# Altium PCB PCB1.PcbDoc
Units mil, origin at the board's own origin, x right, y up, seen from the top; angles counter-clockwise.
Board outline 6313 x 3649 mil, 2 copper layers (Top Layer, Bottom Layer); 84 components, 103 nets, 338 pads, 288 vias.
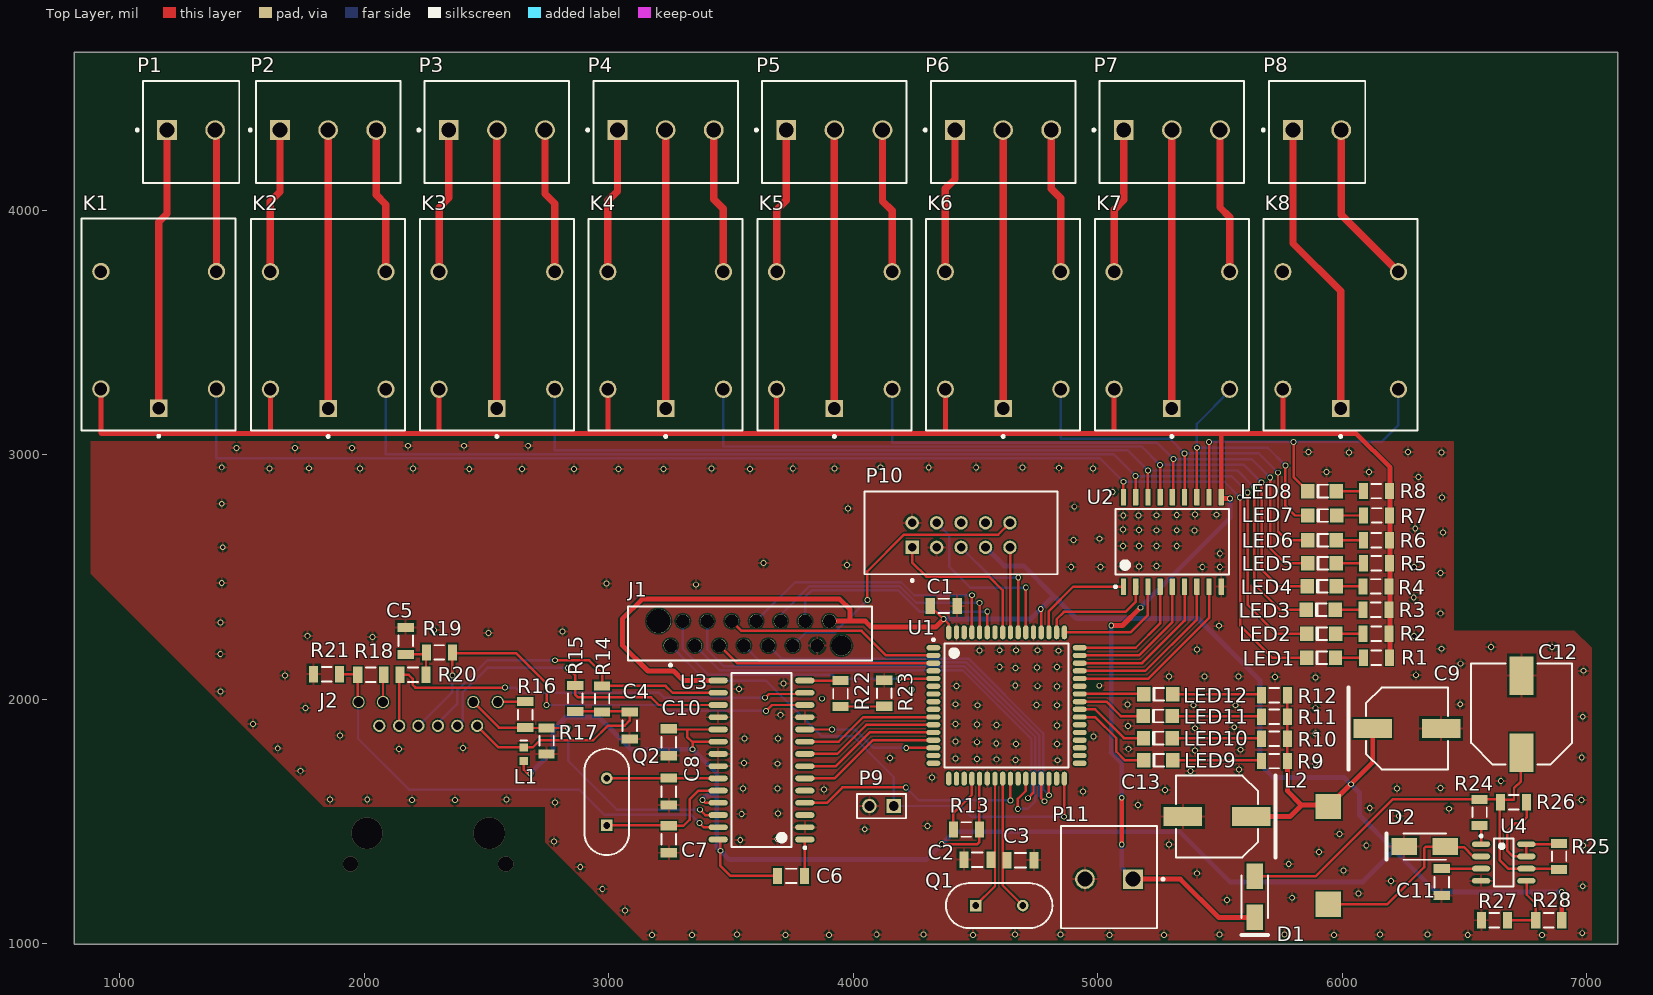
[diagram p0: Top Layer view]
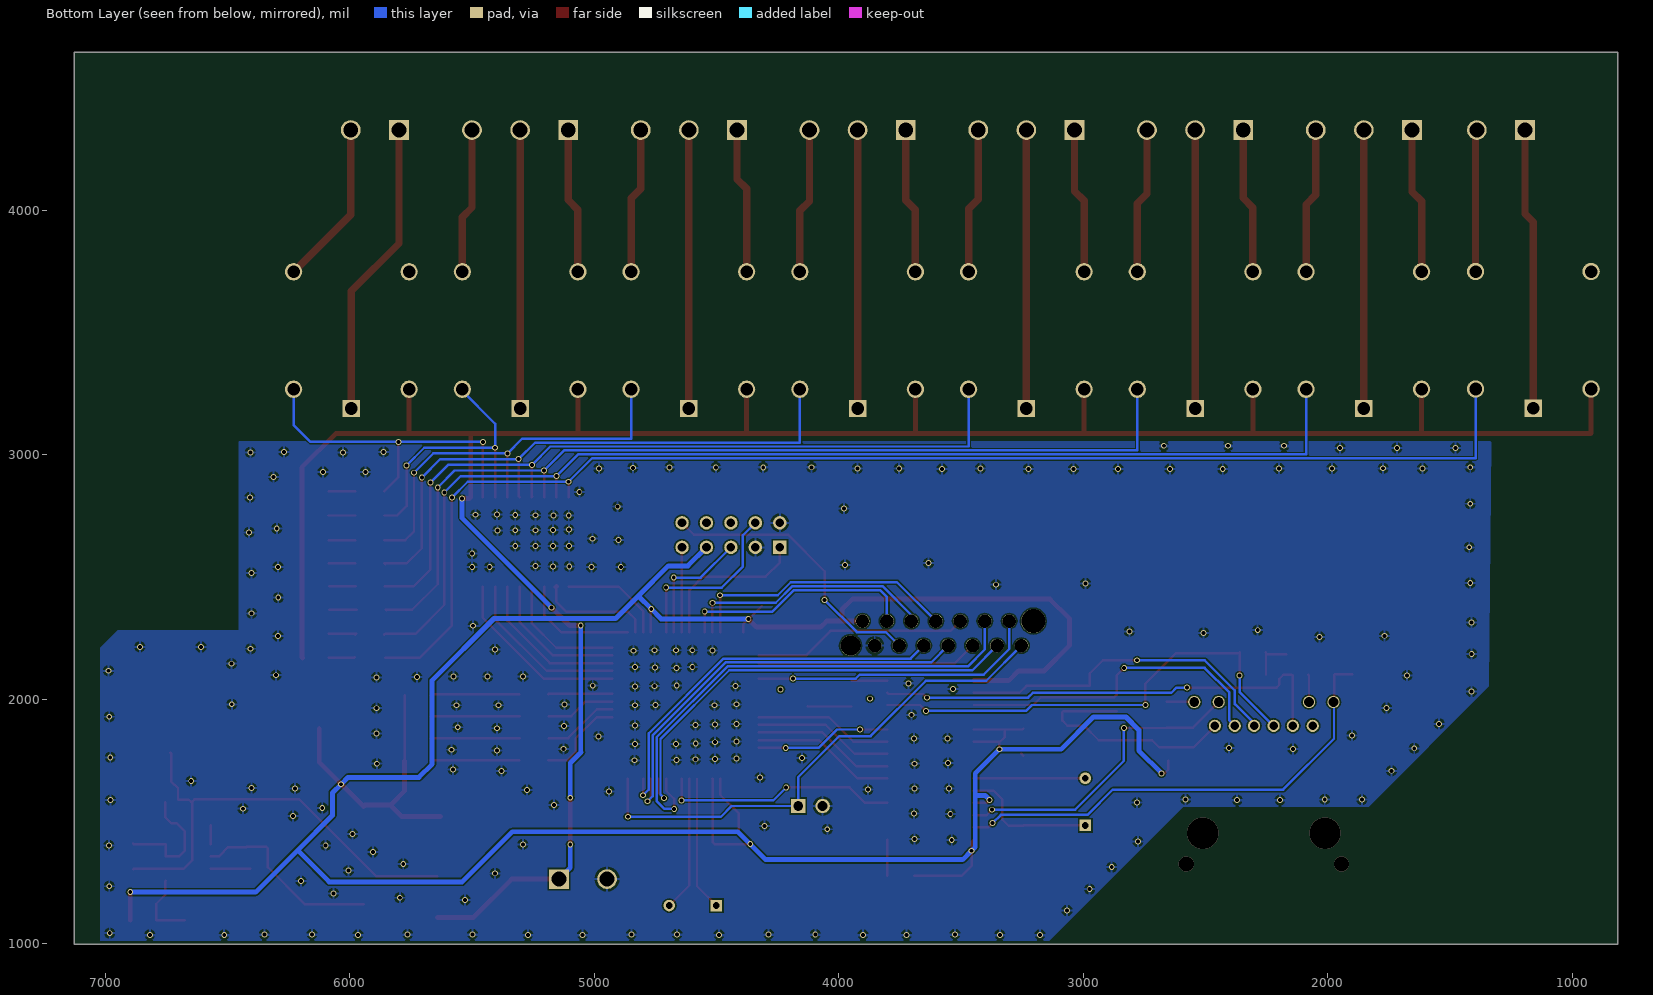
[diagram p1: Bottom Layer view, seen from below]

## Layer stack, top to bottom
Top Solder: solder mask 0.4, Solder Resist, Dk 3.5
Top Layer: signal copper 1.4
Dielectric 1: dielectric 12.6, FR-4, Dk 4.8
Bottom Layer: signal copper 1.4
Bottom Solder: solder mask 0.4, Solder Resist, Dk 3.5

## Board outline
814,998 7127,998 7127,4647 814,4647

## Design rules (kind name [scope] priority, off if disabled: settings)
Clearance [All] p1: gap=6 ignorepadtopadclearanceinfootprint=FALSE except(0: Arc-Hole Track-Hole SMDPad-Hole THPad-Hole Via-Hole Fill-Hole Poly-Hole Region-Hole Text-Hole)
DiffPairsRouting [All] p1: maxlimit=10 minlimit=6 mostfreqgap=10 toplayer_minwidth=15 toplayer_maxwidth=15 toplayer_prefwidth=15 bottomlayer_minwidth=15 bottomlayer_maxwidth=15 bottomlayer_prefwidth=15 maxuncoupledlength=500
HoleSize [All] p1: absolutevalues=TRUE maxlimit=150 minlimit=1 maxpercent=80.000 minpercent=20.000
MinimumSolderMaskSliver [All] p1: minsoldermaskwidth=1.5
PolygonConnect [All] p1: connectstyle=Relief reliefconductorwidth=10 reliefentries=4 polygonreliefangle="90 Angle" airgapwidth=10
RoutingVias [All] p1: holewidth=16 width=20 viastyle="Through Hole" minholewidth=16 minwidth=20 maxholewidth=28 maxwidth=50
SilkToSilkClearance [All] p1: silktosilkclearance=3
SilkToSolderMaskClearance [IsPad] p1: minsilkscreentomaskgap=3.5 clearancetoexposedcopper=TRUE
SolderMaskExpansion [All] p1: expansion=4
Width [All] p1: maxlimit=30 minlimit=6 preferedwidth=10 minimp=50.000000 maximp=50.000000 favimp=50.000000
25 further rules are at their usual default settings.

## Classes and differential pairs
component class ethernet_zasilanie: C4 C5 C6 C7 C8 C9 C10 C11 C12 C13 D1 D2 L1 L2 P11 Q2 R14 R15 R16 R17 R18 R19 R20 R21 R22 R23 R24 R25 R26 R27 R28 U3 U4
component class atmega_darlington_diodes: C1 C2 C3 J1 K1 K2 K3 K4 K5 K6 K8 LED7 LED8 LED9 LED10 LED11 LED12 P1 P2 P3 P4 P5 P6 P7 P8 P9 P10 Q1 R1 R2 R3 R4 R5 R6 R7 R8 R9 R10 R11 R12 R13 U1 U2

## Components (designator, comment, footprint, x,y, rotation, side; value= is the part's Value field where it differs from the comment)
C1 "1uF" CAPC1206(3216)130_L 4370,2382 r180 top
C2 "22pF" CAPC1206(3216)100_L 4508,1345 r0 top
C3 "22pF" CAPC1206(3216)100_L 4684,1343 r180 top
C4 "1uF" CAPC1206(3216)150_L 3086,1893 r90 top
C5 "100nF" CAPC1206(3216)190_L 2170,2239 r270 top
C6 "10uF" CAPC1206(3216)190_L 3746,1278 r0 top
C7 "22pF" CAPC1206(3216)100_L 3246,1428 r90 top
C8 "22pF" CAPC1206(3216)100_L 3246,1623 r90 top
C9 "470uF/16V" PNSC-FK-V-F_V 6264,1881 r0 top
C10 "1uF" CAPC1206(3216)130_L 3246,1824.88 r90 top
C11 "470pF" CAPC1206(3216)100_L 6406,1253 r270 top
C12 "470uF/25V" NIC-CAPA2-10X10_V 6733,1940 r90 top
C13 "470uF/16V" PNSC-FK-V-F_V 5488,1521.22 r180 top
D1 "SS14" FAIR-DO-214AC-2_V 5642,1193 r270 top
D2 "SS14" FAIR-DO-214AC-2_V 6337,1398 r180 top
J1 "490107671412" 490107671412 3578,2270 r180 top
J2 "08D0-1X1T-06-F" PCB_08D0-1X1T-06-F 2262,1672 r180 top
K1 "JS1-12V" PNSC-JS1-12V_V 1160,3533 r90 top
K2 "JS1-12V" PNSC-JS1-12V_V 1853,3532 r90 top
K3 "JS1-12V" PNSC-JS1-12V_V 2543,3532 r90 top
K4 "JS1-12V" PNSC-JS1-12V_V 3233,3532 r90 top
K5 "JS1-12V" PNSC-JS1-12V_V 3923,3532 r90 top
K6 "JS1-12V" PNSC-JS1-12V_V 4613,3532 r90 top
K7 "JS1-12V" PNSC-JS1-12V_V 5303,3532 r90 top
K8 "JS1-12V" PNSC-JS1-12V_V 5993,3532 r90 top
L1 "Inductor" INDC1608L 2653,1776 r270 top value=68uH
L2 "DL22-100" DL22 5943,1362 r270 top
LED1 "150120YS75000" 1206_A 5913,2169.9 r0 top
LED2 "150120YS75000" 1206_A 5914,2267.85 r0 top
LED3 "150120YS75000" 1206_A 5912,2366.85 r0 top
LED4 "150120YS75000" 1206_A 5916,2461.85 r0 top
LED5 "150120YS75000" 1206_A 5917,2556 r0 top
LED6 "150120YS75000" 1206_A 5917,2651 r0 top
LED7 "150120YS75000" 1206_A 5918,2752 r0 top
LED8 "150120YS75000" 1206_A 5917,2852 r0 top
LED9 "150120BS75000" 1206_A 5247,1752 r0 top
LED10 "150120GS75000" 1206_A 5246,1842 r0 top
LED11 "150120YS75000" 1206_A 5245,1932 r0 top
LED12 "150120RS75000" 1206_A 5247,2021 r0 top
P1 "SCREW-5.0/5.08 2WAYS" SCREW-5.0-2WAYS_V 1292.57,4328 r0 top
P2 "SCREW-5.0/5.08 3WAYS" SCREW-5.0-3WAYS_V 1853,4328 r0 top
P3 "SCREW-5.0/5.08 3WAYS" SCREW-5.0-3WAYS_V 2543,4328 r0 top
P4 "SCREW-5.0/5.08 3WAYS" SCREW-5.0-3WAYS_V 3233,4328 r0 top
P5 "SCREW-5.0/5.08 3WAYS" SCREW-5.0-3WAYS_V 3923,4328 r0 top
P6 "SCREW-5.0/5.08 3WAYS" SCREW-5.0-3WAYS_V 4613,4328 r0 top
P7 "SCREW-5.0/5.08 3WAYS" SCREW-5.0-3WAYS_V 5303,4328 r0 top
P8 "SCREW-5.0/5.08 2WAYS" SCREW-5.0-2WAYS_V 5897,4328 r0 top
P9 "PH2541-2-SPGRH-6-3" PH2541-2-SPGRH-6-3_V 4166,1564 r270 top
P10 "JTAG" 3M-2510-6002_V 4441,2672 r0 top
P11 "SCREW-5.0/5.08 2WAYS" SCREW-5.0-2WAYS_V 5046,1265 r180 top
Q1 "16MHz" JPY-HC-49US 4597,1157 r0 top
Q2 "25MHz" JPY-HC-49US 2992,1581 r90 top
R1 "1K" RESC1206(3216)_L 6139,2169.9 r0 top value="1000.00 Ohm"
R2 "1K" RESC1206(3216)_L 6138,2267.8 r0 top value="1000.00 Ohm"
R3 "1K" RESC1206(3216)_L 6137,2366.85 r0 top value="1000.00 Ohm"
R4 "1K" RESC1206(3216)_L 6137,2461.85 r0 top value="1000.00 Ohm"
R5 "1K" RESC1206(3216)_L 6139,2556 r0 top value="1000.00 Ohm"
R6 "1K" RESC1206(3216)_L 6139,2651 r0 top value="1000.00 Ohm"
R7 "1K" RESC1206(3216)_L 6140,2752 r0 top value="1000.00 Ohm"
R8 "1K" RESC1206(3216)_L 6139,2852 r0 top value="1000.00 Ohm"
R9 "1K" RESC1206(3216)_L 5722,1748.05 r0 top value="1000.00 Ohm"
R10 "1K" RESC1206(3216)_L 5722,1839.05 r0 top value="1000.00 Ohm"
R11 "1K" RESC1206(3216)_L 5722,1929.05 r0 top value="1000.00 Ohm"
R12 "1K" RESC1206(3216)_L 5722,2017 r0 top value="1000.00 Ohm"
R13 "10K" RESC1206(3216)_L 4463,1468 r180 top value="10000.00 Ohm"
R14 "51R" RESC1206(3216)_L 2973,2002 r270 top value="51.00 Ohm"
R15 "51R" RESC1206(3216)_L 2863,2004 r270 top value="51.00 Ohm"
R16 "10K" RESC1206(3216)_L 2659,1938 r90 top value="10000.00 Ohm"
R17 "180R" RESC1206(3216)_L 2746,1830 r270 top value="180.00 Ohm"
R18 "10K" RESC1206(3216)_L 2027,2101 r0 top value="10000.00 Ohm"
R19 "51R" RESC1206(3216)_L 2308,2192 r0 top value="51.00 Ohm"
R20 "51R" RESC1206(3216)_L 2200,2101 r180 top value="51.00 Ohm"
R21 "180R" RESC1206(3216)_L 1846.85,2103 r0 top value="180.00 Ohm"
R22 "2K2" RESC1206(3216)_L 3948,2024 r90 top value="2200.00 Ohm"
R23 "100R" RESC1206(3216)_L 4127,2025 r270 top value="100.00 Ohm"
R24 "1R" RESC1206(3216)_L 6561,1538 r270 top value="1.00 Ohm"
R25 "1R" RESC1206(3216)_L 6886,1358 r90 top value="1.00 Ohm"
R26 "1R" RESC1206(3216)_L 6700.06,1579 r0 top value="1.00 Ohm"
R27 "910R" RESC1206(3216)_L 6622,1097 r0 top value="910.00 Ohm"
R28 "1K5" RESC1206(3216)_L 6844,1097 r0 top value="1500.00 Ohm"
U1 "ATmega128-16AU" 64A_L 4627,1975 r0 top
U2 "ULN2803ADW" DW0018A_L 5305,2643.93 r90 top
U3 "ENC28J60-I/SO" SOIC-SO28_L 3625,1752 r180 top
U4 "MC34063ACD-TR" SO8_L 6660,1333 r0 top

## Footprints (in the part's own frame and the unit in brackets; to place one, negate y for a bottom-side part, rotate by r counter-clockwise, add the part's x,y. Pads: shape width x height; smd on the part's side, far side on the other; paste and mask are expansions set on the pad)
3M-2510-6002_V [mm] "Header, 10-Leads, Body 20.02x8.59mm, Pitch 2.54mm"
  rect 1.4x1.4 hole 0.89 mask+0.051: 1(-5.08,-1.27)
  round 1.4 hole 0.89 mask+0.051: 2(-2.54,-1.27) 3(0,-1.27) 4(2.54,-1.27) 5(5.08,-1.27) 6(5.08,1.27) 7(2.54,1.27) 8(0,1.27) 9(-2.54,1.27) 10(-5.08,1.27)
  silkscreen extent -10.01,-4.84 10.01,4.52, body extent -10.01,-4.12 10.01,4.52, height 9.95
64A_L [mm] "Thin QFP, 64-Leads, Body 14x14mm, Pitch 0.8mm, IPC High Density"
  oval 1.45x0.55 smd: 1(-7.6,6) 2(-7.6,5.2) 3(-7.6,4.4) 4(-7.6,3.6) 5(-7.6,2.8) 6(-7.6,2) 7(-7.6,1.2) 8(-7.6,0.4) 9(-7.6,-0.4) 10(-7.6,-1.2) 11(-7.6,-2) 12(-7.6,-2.8) 13(-7.6,-3.6) 14(-7.6,-4.4) 15(-7.6,-5.2) 16(-7.6,-6) 33(7.6,-6) 34(7.6,-5.2) 35(7.6,-4.4) 36(7.6,-3.6) 37(7.6,-2.8) 38(7.6,-2) 39(7.6,-1.2) 40(7.6,-0.4) 41(7.6,0.4) 42(7.6,1.2) 43(7.6,2) 44(7.6,2.8) 45(7.6,3.6) 46(7.6,4.4) 47(7.6,5.2) 48(7.6,6)
  oval 0.55x1.45 smd: 17(-6,-7.6) 18(-5.2,-7.6) 19(-4.4,-7.6) 20(-3.6,-7.6) 21(-2.8,-7.6) 22(-2,-7.6) 23(-1.2,-7.6) 24(-0.4,-7.6) 25(0.4,-7.6) 26(1.2,-7.6) 27(2,-7.6) 28(2.8,-7.6) 29(3.6,-7.6) 30(4.4,-7.6) 31(5.2,-7.6) 32(6,-7.6) 49(6,7.6) 50(5.2,7.6) 51(4.4,7.6) 52(3.6,7.6) 53(2.8,7.6) 54(2,7.6) 55(1.2,7.6) 56(0.4,7.6) 57(-0.4,7.6) 58(-1.2,7.6) 59(-2,7.6) 60(-2.8,7.6) 61(-3.6,7.6) 62(-4.4,7.6) 63(-5.2,7.6) 64(-6,7.6)
  silkscreen extent -7.72,-6.45 6.45,6.95, body extent -7,-7 7,7, height 1.6
1206_A [mm] "Chip LED, 2-Leads, Body 3.2x1.6mm, IPC Medium Density"
  rect 1.4x1.5 smd: 1(-1.5,0) 2(1.5,0)
  silkscreen extent -0.5,-0.66 0.6,0.65, body extent -1.6,-0.8 1.6,0.8, height 0.68
490107671412 [mm] "REDFIT IDC SKEDD Connector, pitch 2.54mm, 14p"
  round 1.42 hole 1.4: 1(8.255,1.27) 2(6.985,-1.27) 3(5.715,1.27) 4(4.445,-1.27) 5(3.175,1.27) 6(1.905,-1.27) 7(0.635,1.27) 8(-0.635,-1.27) 9(-1.905,1.27) 10(-3.175,-1.27) 11(-4.445,1.27) 12(-5.715,-1.27) 13(-6.985,1.27) 14(-8.255,-1.27)
  round 2.1 hole 2.1 unplated: MH1(-9.485,1.27)
  round 2.5 hole 2.5 unplated: MH2(9.485,-1.27)
  silkscreen extent -12.68,-2.8 12.68,3.42, body extent -12.68,-2.8 12.68,2.8, height 10.48
CAPC1206(3216)100_L [mm] "Chip Capacitor, Body 3.2x1.6mm, Height 1mm, IPC High Density"
  rect 0.95x1.7 smd: 1(-1.4,0) 2(1.4,0)
  silkscreen extent -0.55,-0.75 0.55,0.75, body extent -1.7,-0.9 1.7,0.9, height 1
CAPC1206(3216)130_L [mm] "Chip Capacitor, Body 3.2x1.6mm, Height 1.3mm, IPC High Density"
  rect 0.95x1.7 smd: 1(-1.4,0) 2(1.4,0)
  silkscreen extent -0.55,-0.75 0.55,0.75, body extent -1.7,-0.9 1.7,0.9, height 1.3
CAPC1206(3216)150_L [mm] "Chip Capacitor, Body 3.2x1.6mm, Height 1.5mm, IPC High Density"
  rect 0.95x1.7 smd: 1(-1.4,0) 2(1.4,0)
  silkscreen extent -0.55,-0.75 0.55,0.75, body extent -1.7,-0.9 1.7,0.9, height 1.5
CAPC1206(3216)190_L [mm] "Chip Capacitor, Body 3.2x1.6mm, Height 1.9mm, IPC High Density"
  rect 0.95x1.7 smd: 1(-1.4,0) 2(1.4,0)
  silkscreen extent -0.55,-0.75 0.55,0.75, body extent -1.7,-0.9 1.7,0.9, height 1.9
DL22 [mm]
  rect 2.64x2.64 smd: 1(5.08,0) 2(-5.08,0)
DW0018A_L [mm] "SOIC, 18-Leads, Body 11.8x7.6mm, Pitch 1.27mm, IPC High Density"
  rrect18% 1.7x0.55 smd: 1(-4.65,5.08) 2(-4.65,3.81) 3(-4.65,2.54) 4(-4.65,1.27) 5(-4.65,0) 6(-4.65,-1.27) 7(-4.65,-2.54) 8(-4.65,-3.81) 9(-4.65,-5.08) 10(4.65,-5.08) 11(4.65,-3.81) 12(4.65,-2.54) 13(4.65,-1.27) 14(4.65,0) 15(4.65,1.27) 16(4.65,2.54) 17(4.65,3.81) 18(4.65,5.08)
  silkscreen extent -4.77,-5.9 3.4,6.03, body extent -3.8,-5.9 3.8,5.9, height 2.65
FAIR-DO-214AC-2_V [mm] "DO-214, 2-Leads, Body 4.375x2.725mm"
  rect 2.65x1.75 smd: 1(-2.15,0) 2(2.15,0)
  silkscreen extent -2.19,-1.36 3.98,1.36, body extent -2.19,-1.36 2.19,1.36, height 2.5
INDC1608L [mm] "Chip Inductor, Body 1.6x0.8mm, IPC High Density"
  rect 0.8x0.9 smd: 1(-0.7,0) 2(0.7,0)
  silkscreen extent -1.4,-0.35 -1.4,0.35, body extent -0.87,-0.48 0.87,0.48, height 0.55
JPY-HC-49US [mm] "THD, 2-Leads, Body 11.05x4.65mm, Pitch 4.9mm"
  rect 1.2x1.2 hole 0.7: 1(-2.45,0)
  round 1.2 hole 0.7: 2(2.45,0)
  silkscreen extent -5.53,-2.32 5.53,2.32, body extent -5.53,-2.33 5.52,2.32, height 3.5
NIC-CAPA2-10X10_V [mm] "Aluminum Electrolytic Capacitor, Diameter 10mm, Height 10.8mm, Pitch 8mm"
  rect 4x2.5 smd: 1(-4,0) 2(4,0)
  silkscreen extent -5.25,-5.25 5.25,5.25, body extent -4.96,-4.99 5,4.99, height 10.8
PCB_08D0-1X1T-06-F [mm]
  round 1.27 hole 0.89: 1(-5.08,-5.585) 2(-3.015,-5.585) 3(-1.015,-5.585) 4(1.015,-5.585) 5(3.015,-5.585) 6(5.08,-5.585)
  round 1.27 hole 1.02: 7(-7.23,-8.055) 8(-4.69,-8.055) 9(4.69,-8.055) 10(7.23,-8.055)
  body extent -8.85,-9.03 8.16,16.5, height 13.49
PH2541-2-SPGRH-6-3_V [mm] "Male Header, Pitch 2.54mm, 2x1 Position, Mated Height 6mm, Tail Length 3mm"
  rect 1.5x1.5 hole 1.02: 1(0,0)
  round 1.5 hole 1.02: 2(0,-2.54)
  silkscreen extent -1.27,-3.81 1.27,1.27, body extent -1.27,-3.81 1.27,1.27, height 8.4
PNSC-FK-V-F_V [mm] "CAPAE, 2-Leads, Body 8.50x8.50mm"
  rect 4x2 smd: 1(-3.55,0) 2(3.55,0)
  silkscreen extent -6.05,-4.25 4.25,4.25, body extent -5,-4.25 5,4.25, height 10.5
PNSC-JS1-12V_V [mm] "THD, 5-Leads, Body 22x16mm"
  rect 1.8x1.8 hole 1.3: 1(-8.7,0)
  round 1.8 hole 1.3: 2(-6.7,-6) 3(5.5,-6) 4(5.5,6) 5(-6.7,6)
  silkscreen extent -11.72,-8 11,8, body extent -11,-8 11,8, height 16.4
RESC1206(3216)_L [mm] "Chip Resistor, Body 3.2x1.6mm, IPC High Density"
  rect 0.95x1.7 smd: 1(-1.35,0) 2(1.35,0)
  silkscreen extent -0.5,-0.75 0.5,0.75, body extent -1.67,-0.87 1.67,0.87, height 0.75
SCREW-5.0-2WAYS_V [mm] "Socket, Screw Terminal Block, 2-Leads, Pitch 5mm, 90 Degree Angle, Through-Hole"
  rect 2.05x2.05 hole 1.55: 1(-2.5,0)
  round 2.05 hole 1.55: 2(2.5,0)
  silkscreen extent -5.72,-5.5 5,5.1, body extent -5,-5.5 5.02,5.1, height 18.2
SCREW-5.0-3WAYS_V [mm] "Socket, Screw Terminal Block, 3-Leads, Pitch 5mm, 90 Degree Angle, Through-Hole"
  rect 2.05x2.05 hole 1.55: 1(-5,0)
  round 2.05 hole 1.55: 2(0,0) 3(5,0)
  silkscreen extent -8.22,-5.5 7.5,5.1, body extent -7.5,-5.5 7.5,5.1, height 18.2
SO8_L [mm] "SOIC, 8-Leads, Body 4.9x3.9mm, Pitch 1.27mm, IPC High Density"
  oval 1.9x0.6 smd: 1(-2.35,1.905) 2(-2.35,0.635) 3(-2.35,-0.635) 4(-2.35,-1.905) 5(2.35,-1.905) 6(2.35,-0.635) 7(2.35,0.635) 8(2.35,1.905)
  silkscreen extent -2.47,-2.5 1,2.88, body extent -2,-2.5 2,2.5, height 1.75
SOIC-SO28_L [mm] "SOIC, 28-Leads, Body 17.9x7.5mm, Pitch 1.27mm, IPC High Density"
  oval 2x0.6 smd: 1(-4.5,8.255) 2(-4.5,6.985) 3(-4.5,5.715) 4(-4.5,4.445) 5(-4.5,3.175) 6(-4.5,1.905) 7(-4.5,0.635) 8(-4.5,-0.635) 9(-4.5,-1.905) 10(-4.5,-3.175) 11(-4.5,-4.445) 12(-4.5,-5.715) 13(-4.5,-6.985) 14(-4.5,-8.255) 15(4.5,-8.255) 16(4.5,-6.985) 17(4.5,-5.715) 18(4.5,-4.445) 19(4.5,-3.175) 20(4.5,-1.905) 21(4.5,-0.635) 22(4.5,0.635) 23(4.5,1.905) 24(4.5,3.175) 25(4.5,4.445) 26(4.5,5.715) 27(4.5,6.985) 28(4.5,8.255)
  silkscreen extent -4.62,-9.05 3.1,9.23, body extent -3.8,-9.05 3.8,9.05, height 2.65

## Part data
C1 C10: library part CMP-1037-04671-1, "CAP 1uF 10V ±5% 1206 (3216 Metric) Thickness 1.3mm SMD", Case-EIA=1206, Case-Metric=3216, Rated Voltage="10 V", Tolerance=±5%, Max Thickness="1.3 mm", Technology=SMT
C2 C3 C7 C8: library part CMP-1037-00952-1, "CAP 22pF 10V ±0.25pF 1206 (3216 Metric) Thickness 1mm SMD", Case-EIA=1206, Case-Metric=3216, Rated Voltage="10 V", Tolerance=±0.25pF, Max Thickness="1 mm", Technology=SMT
C4: library part CMP-1037-04667-1, "CAP 1uF 6.3V ±5% 1206 (3216 Metric) Thickness 1.45mm SMD", Case-EIA=1206, Case-Metric=3216, Rated Voltage="6.3 V", Tolerance=±5%, Max Thickness="1.45 mm", Technology=SMT
C5: library part CMP-1037-04169-1, "CAP 100nF 10V ±1% 1206 (3216 Metric) Thickness 1.9mm SMD", Case-EIA=1206, Case-Metric=3216, Rated Voltage="10 V", Tolerance=±1%, Max Thickness="1.9 mm", Technology=SMT
C6: library part CMP-1037-04960-1, "CAP 10uF 6.3V ±5% 1206 (3216 Metric) Thickness 1.9mm SMD", Case-EIA=1206, Case-Metric=3216, Rated Voltage="6.3 V", Tolerance=±5%, Max Thickness="1.9 mm", Technology=SMT
C9 C13: library part CMP-2000-06204-1, "Aluminum Electrolytic Capacitor, 470 uF, +/- 20%, 16 V, 2-Pin SMD (Size Code F), -55 to 105 degC, RoHS, Tape and Reel", Capacitance=470µF, Case Size/Dimension=O8x10.2mm, Lifetime@Temperature=2000Hrs@105°C, Manufacturer=Panasonic, Operating Temp-Max=105°C, Operating Temp Range=-55to+105°C, Package Description="2-Pin Electrolytic Aluminum Capacitor, Body 8.3 x 8.3 mm", Package Reference=FK-V-F, Rated Voltage=16V, Ripple Current=600mA, Datasheet URL=http://industrial.panasonic.com/cdbs/www-data/pdf/RDE0000/ABA0000C1181.pdf, Datasheet Version=03/2016, Impedance=0.16O, Manufacturer URL=http://www.panasonic.com/, Mounting Technology=SurfaceMount, Package URL=http://industrial.panasonic.com/cdbs/www-data/pdf/RDE0000/DME0000COL48.pdf, Series=FK, Type=Can
C11: library part CMP-1037-02128-1, "CAP 470pF 10V ±1% 1206 (3216 Metric) Thickness 1mm SMD", Case-EIA=1206, Case-Metric=3216, Rated Voltage="10 V", Tolerance=±1%, Max Thickness="1 mm", Technology=SMT
C12: library part CMP-0687-00002-1, "Aluminum Electrolytic Capacitor, UD Series, Low Impedance, 470 uF, 25 V, + / - 20%, -55 to 105 degC, Chip Type, 10 x 10 mm D x L, Pb-Free, Reel", Manufacturer=Nichicon, PartNumber=UUD1E471MNL1GS, Rated Capacitance="470 uF", Rated Ripple Current (at 100kHz)="670 mA", Rated Voltage="25 V", Tolerance Rated Capacitance="-20 to 20%", ComponentLink1Description="Manufacturer URL", ComponentLink1URL=http://www.nichicon.co.jp/, ComponentLink2Description=Datasheet, ComponentLink2URL=http://products.nichicon.co.jp/en/pdf/XJA043/e-ud.pdf, ComponentLink3Description="Package Specification", ComponentLink3URL=http://products.nichicon.co.jp/en/pdf/XJA043/e-ud.pdf, DatasheetVersion=08/2012, Diameter="10 mm", Endurance Time="5000 h", Impedance="0.09 Ohm", Length="10 mm", Mounting Technology="Surface Mount", PackageDescription="2-Pin Surface Mount Device, Diameter 10 mm, Height 10 mm, Pitch 8 mm", PackageReference=CAPAE-D10H10, Packing="Dia382mm Reel", RoHS=TRUE
D1 D2: library part CMP-2000-04943-1, "Schottky Rectifier, 1.1 W, -65 to 125 degC, 2-Pin SMD, RoHS, Tape and Reel", Average Forward Current-Max (A)=1, Manufacturer=Fairchild, Package Body Material=PLASTIC/EPOXY, Package Description="2-Pin Surface Mount Device, Body 4.375 x 2.725 mm", Package Reference=DO-214AC-2, Package Shape=RECTANGULAR, Package Style=SMALLOUTLINE, Peak Reflow Temperature (Cel)=260, Power Dissipation Limit-Max (W)=1.1, Rep Pk Reverse Voltage-Max (V)=40, Additional Feature=FREEWHEELINGDIODE, CAGE Code=1HBD3,07933,59621,7D893, Configuration=SINGLE, Datasheet URL=http://www.onlinecomponents.com/datasheet/ss14.aspx?p=11369800, Datasheet Version=Oct-13, Diode Element Material=SILICON, JEDEC-95 Code=DO-214AC, JESD-30 Code=R-PDSO-C2, JESD-97 Code=e3, Lead Free=YES, Manufacturer URL=https://www.fairchildsemi.com/, Moisture Sensitivity Level=1, Number of Elements=1, Number of Terminals=2, Package URL=https://www.fairchildsemi.com/package-drawings/DO/DO214AC.pdf, RoHS Compliant=YES, Signal Diode Type=SIGNALDIODE, Surface Mount=YES, Technology=SCHOTTKY, Terminal Finish=MATTETIN, Terminal Form=CBEND, Terminal Position=DUAL
J1: library part CMP-1502-02453-1, "REDFIT IDC SKEDD Connector WR-WST, pitch 2.54 mm, 14 pins", Contact Resistance=10mOhm, Manufacturer="Wurth Elektronik", Operating Temperature=-25to105degC, Rated Current=1A, Working Voltage=500VAC, Datasheet URL=https://katalog.we-online.de/em/datasheet/490107671412.pdf, Manufacturer URL=http://www.we-online.de, Mounting Technology=Plug-in, Package Reference=490107671412, Packaging=Tube, Part Number=490107671412, PCB Thickness=1.6mm, Pin Number=14, Pitch=2.54mm, Publisher=WurthElektronik
J2: supplier part number 1=507-1445-ND, helpurl=https://www.belfuse.com/resources/ICMs/ICMs%20Drawings/08B0-1X1T-06-F.pdf, supplier 1=Digi-Key
K1 K2 K3 K4 K5 K6 K7 K8: library part CMP-2000-06502-1, "Cubic Type 1C Power Relay, SPDT, 10 A, 12 V, -40 to 70 degC, 5-Pin THD, RoHS, Bulk", Coil Current=30mA, Coil operating lower percent limit=70%, Coil operating upper percent limit=130%, Coil Resistance=400ohm, Coil Voltage VDC Nom=12V, Contact Current Max=10A, Contact Voltage AC Nom=277V, Contact Voltage DC Nom=100V, Current, contact min=6A@277Vac, Manufacturer=Panasonic, Nom Operating Power=360mW, Package Description="5-Pin Through Hole Device, Body 22 x 16 mm", Resistance, coil=400R, Temperature, operating (a) max=70°C, Temperature, operating (a) min=-40°C, Time, operating=10ms, Voltage, contact AC max=125V, Voltage, switching AC/DC min=277Vac, Approval Bodies=UL&CSA,TUV, Coil Type=DC, Configuration, contact=SPCO, Contact Configuration=SPDT, Current, contact AC max=10A, Current, switch max=10A, Datasheet URL=https://www3.panasonic.biz/ac/e_download/control/relay/power/catalog/mech_eng_js.pdf, Datasheet Version=12/2016, Depth, external=16.4mm, Diameter, PCB hole=1.3mm, External Depth=22mm, External Height=16mm, External Width=22mm, Length / Height, external=22mm, Manufacturer URL=http://www.panasonic.com/, Material, contact=Silveralloy, Mounting Technology=ThroughHole, Package Reference=JS1-12V, Power, coil DC=360mW, Relay Mounting=ThroughHole, Relay Type=Power, Time, release=10ms, Voltage, coil DC nom=12V, Width, external=16.4mm
LED1 LED2 LED3 LED4 LED5 LED6 LED7 LED8 LED11: library part CMP-1426-00019-1, "SMD mono-color Chip LED, WL-SMCW, Yellow", Color=Yellow, Manufacturer="Wuerth Elektronik", ComponentLink1Description="Manufacturer URL", ComponentLink1URL=http://www.we-online.com, ComponentLink2Description=Datasheet, ComponentLink2URL=http://katalog.we-online.com/led/datasheet/150120YS75000.pdf, PackageReference=1206_A, PartNumber=150120YS75000
LED9: library part CMP-1426-00015-1, "SMD mono-color Chip LED, WL-SMCW, Blue", Color=Blue, Manufacturer="Wuerth Elektronik", ComponentLink1Description="Manufacturer URL", ComponentLink1URL=http://www.we-online.com, ComponentLink2Description=Datasheet, ComponentLink2URL=http://katalog.we-online.com/led/datasheet/150120BS75000.pdf, PackageReference=1206_A, PartNumber=150120BS75000
LED10: library part CMP-1426-00014-1, "SMD mono-color Chip LED, WL-SMCW, Green", Color=Green, Manufacturer="Wuerth Elektronik", ComponentLink1Description="Manufacturer URL", ComponentLink1URL=http://www.we-online.com, ComponentLink2Description=Datasheet, ComponentLink2URL=http://katalog.we-online.com/led/datasheet/150120GS75000.pdf, PackageReference=1206_A, PartNumber=150120GS75000
LED12: library part CMP-1426-00013-1, "SMD mono-color Chip LED, WL-SMCW, Red", Color=Red, Manufacturer="Wuerth Elektronik", ComponentLink1Description="Manufacturer URL", ComponentLink1URL=http://www.we-online.com, ComponentLink2Description=Datasheet, ComponentLink2URL=http://katalog.we-online.com/led/datasheet/150120RS75000.pdf, PackageReference=1206_A, PartNumber=150120RS75000
P1 P8 P11: library part CMP-0617-00009-1, "Socket, Screw Terminal Block, 2 Way, 5.0 mm Pitch, 90 Degree Angle, Through-Hole", Contact Resistance="20 mOhm", Insulation Resistance="5000 MOhm / 1000 V", Manufacturer="No Vendor", Rated Current="25 A", Rated Voltage="300 V", Temperature Range="-40 to 105 degC", ComponentLink1Description=Datasheet, ComponentLink1URL="5mm screw terminal in SVN", Mounting Technology="Through Hole", PackageDescription="Socket, Screw Terminal Block, 2 Way, Pitch 5 mm, 90 Degree Angle, Through-Hole", PartNumber="SCREW-5.0/5.08 2WAYS", Poles=2
P2 P3 P4 P5 P6 P7: library part CMP-0617-00010-1, "Socket, Screw Terminal Block, 3 Way, 5.0 mm Pitch, 90 Degree Angle, Through-Hole", Contact Resistance="20 mOhm", Insulation Resistance="5000 MOhm / 1000 V", Manufacturer="No Vendor", Rated Current="25 A", Rated Voltage="300 V", Temperature Range="-40 to 105 degC", ComponentLink1Description=Datasheet, ComponentLink1URL="5mm screw terminal in SVN", Mounting Technology="Through Hole", PackageDescription="Socket, Screw Terminal Block, 3 Way, Pitch 5 mm, 90 Degree Angle, Through-Hole", PartNumber="SCREW-5.0/5.08 3WAYS", Poles=3
P9: library part CMP-0261-00001-1, "Male Header, Pitch 2.54mm, 2x1 Position, Mated Height 6mm, Tail Length 3mm", ComponentLink1Description="Manufacturer URL", ComponentLink1URL=http://www.suzhoupinchao.com/, Mounting Technology="Through Hole", PackageDescription="2-Pin Male Header IDC, 2.54 x 5.08 mm Body, 2.54 mm Pitch", PackageReference=PH2541-2-SPGRH-6-3, PartNumber=PH2541-2-SPGRH-6-3
P10: library part CMP-2000-05545-1, "Male Header, Pitch 2.54 mm, 2 x 5 Position, Height 9.91 mm, Tail Length 2.84 mm, -55 to 105 degC, RoHS, Bulk", Color=Gray, Manufacturer=3M, Package Description="Male Header, Pitch 2.54 mm, 2 x 5 Position, Height 9.91 mm, Tail Length 2.84 mm", Package Reference=2510-6002, Standard Package=784, Associated Product="3505-33(1000BX)-ND / -CONNEJECTORLATCHLONGSNAP-IN", Catalog Drawings=6002UB,RBSeries, Category=Connectors,Interconnects, Connector Type=Header,Shrouded, Contact Finish=Gold, Contact Finish Thickness=30µin(0.76µm), Contact Mating Length="0.243\"(6.17mm)", Contact Type=MalePin, Datasheet URL=http://multimedia.3m.com/mws/media/330367O/3mtm-100-in-4-wall-hdr-rohs-lp-straightra-hitemp-ts0770.pdf, Datasheet Version="Rev. M, 08/2014", Dynamic Catalog=2500Series, Family=RectangularConnectors-Headers,MalePins, Manufacturer URL=http://www.3m.com/, Mating Products="CHG-2010-S01010-KEP-ND / -CONNRCPTIDC10POS24-22AWG / 3M11964-ND / -CONNSOCKET10POSIDCW/STRREL / 89110-0003-ND / -CONNSOCKET10POSIDCW/STRREL / 5110-B7A2PL-ND / -10/2R/BMSKT/.100 / MKC10E-ND / -CONN10POSIDCSOCKET10AUW/POL / MSC10E-ND / -CONN10POSIDCSOCKET15GOLD / D89110-0101HK-ND / -CONN10POSIDCSOCKETGOLDW/POL / D89110-0001HK-ND / -CONN10POSIDCSOCKETGOLD / MSPV10-ND / -CONNSOCKETPCBVERT10POS.1\" / 3M9088-ND / -CONNRECEPTIDC10POS24-22AWG / More...", Mounting Technology=ThroughHole, Mounting Type=ThroughHole, Number of Positions=10, Number of Positions Loaded=All, Number of Rows=2, Other Names="5400782713 / 54007827139 / 80-6105-6503-0 / 80610565030 / MHB10G / MHB10K", Packaging=Bulk, Pitch="0.100\"(2.54mm)", Product Training Modules=IDCWiremountConnectorsPrimer, Row Spacing="0.100\"(2.54mm)", Series=2500, Termination=Solder
Q1: library part CMP-2100-03645-1, "Crystal, 16 MHz, +/- 30 ppm, 18 pF, -20 to 70 degC, 2-Pin THD", Manufacturer="Jing peng yuan", Package Description="2-Pin Throug Hole Device, Body 11.05 x 4.65 mm, Pitch 4.9 mm", Package Reference=HC-49US, Datasheet URL=https://statics3.seeedstudio.com/images/opl/datasheet/306010014.pdf, Datasheet Version=42125.0
Q2: library part CMP-2100-03645-1, "Crystal, 25 MHz, +/- 30 ppm, 22 pF, -20 to 70 degC, 2-Pin THD", Manufacturer="Jing peng yuan", Package Description="2-Pin Throug Hole Device, Body 11.05 x 4.65 mm, Pitch 4.9 mm", Package Reference=HC-49U, Datasheet URL=https://pl.mouser.com/datasheet/2/96/008-0308-0-1160929.pdf, Datasheet Version=42125.0
R1 R2 R3 R4 R5 R6 R7 R8 R9 R10 R11 R12: library part CMP-1014-00510-1, "1K 0.25W 1% 1206 (3216 Metric)  SMD", Case-EIA=1206, Case-Metric=3216, Power="0.25 W", Tolerance="1 %", Technology=SMT
R13 R16 R18: library part CMP-1014-00623-1, "10K 0.25W 1% 1206 (3216 Metric)  SMD", Case-EIA=1206, Case-Metric=3216, Power="0.25 W", Tolerance="1 %", Technology=SMT
R14 R15 R19 R20: library part CMP-1014-00364-1, "51R 0.25W 1% 1206 (3216 Metric)  SMD", Case-EIA=1206, Case-Metric=3216, Power="0.25 W", Tolerance="1 %", Technology=SMT
R17 R21: library part CMP-1014-00424-1, "180R 0.25W 1% 1206 (3216 Metric)  SMD", Case-EIA=1206, Case-Metric=3216, Power="0.25 W", Tolerance="1 %", Technology=SMT
R22: library part CMP-1014-00546-1, "2K2 0.25W 1% 1206 (3216 Metric)  SMD", Case-EIA=1206, Case-Metric=3216, Power="0.25 W", Tolerance="1 %", Technology=SMT
R23: library part CMP-1014-00397-1, "100R 0.25W 1% 1206 (3216 Metric)  SMD", Case-EIA=1206, Case-Metric=3216, Power="0.25 W", Tolerance="1 %", Technology=SMT
R24 R25 R26: library part CMP-1014-00171-1, "1R 0.25W 1% 1206 (3216 Metric)  SMD", Case-EIA=1206, Case-Metric=3216, Power="0.25 W", Tolerance="1 %", Technology=SMT
R27: library part CMP-1014-00506-1, "910R 0.25W 1% 1206 (3216 Metric)  SMD", Case-EIA=1206, Case-Metric=3216, Power="0.25 W", Tolerance="1 %", Technology=SMT
R28: library part CMP-1014-00528-1, "1K5 0.25W 1% 1206 (3216 Metric)  SMD", Case-EIA=1206, Case-Metric=3216, Power="0.25 W", Tolerance="1 %", Technology=SMT
U1: library part CMP-0095-00653-1, "8-bit AVR Microcontroller, 4.5-5.5V, 128KB Flash, 4KB EEPROM, 4KB SRAM, 64-pin TQFP, Industrial Grade (-40°C to 85°C), Reel", Code_JEDEC=MS-026-AEB, ComponentLink1Description="Manufacturer URL", ComponentLink1URL=http://www.atmel.com/, ComponentLink2Description="ATmega128(L) Datasheet", ComponentLink2URL=http://www.atmel.com/dyn/resources/prod_documents/doc2467.pdf, ComponentLink3Description="ATmega128(L) Summary", ComponentLink3URL=http://www.atmel.com/dyn/resources/prod_documents/2467S.pdf, DatasheetVersion="revX, Jun-2011", PackageDescription="64-Pin Plastic Thin Profile Quad Flat Pack, 14 x 14 x 1.0 mm Body, 0.8 mm Pitch (TQFP)", PackageReference=64A, PackageVersion="revC, Oct-2010"
U2: library part CMP-2000-07353-1, "Darlington Transistor NPN, 50 V, 0.5 A, -40 to 85 degC, 18-Pin SOIC (DW), Green (RoHS & no Sb/Br), Tube", Collector Emitter Voltage V(br)ceo=50V, Current Ic Continuous a Max=500mA, Manufacturer="Texas Instruments", Operating Temperature Max=85°C, Operating Temperature Min=-40°C, Operating Temperature Range=-40°Cto+85°C, Package / Case=18-SOIC, Package Description="18-Pin Plastic Small Outline, Body 11.55 x 7.5 mm, Pitch 1.27 mm", Package Reference=DW18, Package Version="4040000-3/G, 01/2011", Transistor Case Style=SOIC, Base Number=2803, Datasheet URL=http://www.ti.com/lit/ds/symlink/uln2803a.pdf, Datasheet Version="Rev. G, 01/2015", DC Collector Current=500mA, Device Marking=ULN2803ADW, Id=0.5A, Manufacturer URL=http://www.ti.com/, Module Configuration=Eight, Mounting Technology=SurfaceMount, MSL=MSL2-1year, No. of Pins=18, No. of Transistors=8, Package URL=http://www.ti.com/lit/ml/mpds172a/mpds172a.pdf, SVHC=NoSVHC(19-Dec-2012), Transistor Polarity=NPN
U3: library part CMP-0186-00132-2, "Stand-Alone Ethernet Controller with SPI Interface, 28-Pin SOIC, Industrial Temperature", Code_JEDEC=MS-013, ComponentLink1Description="Manufacturer URL", ComponentLink1URL=http://www.microchip.com/, ComponentLink2Description=Datasheet, ComponentLink2URL=http://ww1.microchip.com/downloads/en/DeviceDoc/39662c.pdf, ComponentLink3Description="Package Specification", ComponentLink3URL=http://www.microchip.com/stellent/groups/techpub_sg/documents/packagingspec/en012702.pdf, DatasheetVersion="revC, Jan-2008", PackageDescription="28-Lead Plastic Small Outline (SO) - Wide 7.50mm Body [SOIC]", PackageReference=SOIC-SO28, PackageVersion="revBB, Aug-2009", RevisionNote="URLs added."
U4: library part CMP-0241-00016-1, "DC/DC converter control circuit, 8-Pin SO, Tape and Reel", Code_IPC=SOIC127P600-8, Code_JEDEC=MS-012-AA, ComponentLink1Description="Manufacturer URL", ComponentLink1URL=http://www.st.com, ComponentLink2Description=Datasheet, ComponentLink2URL=http://www.st.com/internet/com/TECHNICAL_RESOURCES/TECHNICAL_LITERATURE/DATASHEET/CD00001232.pdf, ComponentLink3Description="Package Specification", ComponentLink3URL=http://www.st.com/internet/com/TECHNICAL_RESOURCES/TECHNICAL_LITERATURE/PACKAGE_INFORMATION/CD00004680.pdf, DatasheetVersion=Nov-2007, PackageDescription="8-Pin Small Outline Integrated Circuit 1.27 mm Pitch", PackageReference=SO8, PackageVersion=Dec-2002
L1: Published=8-Jun-2000, Publisher="Altium Limited"
L2: helpurl=https://www.tme.eu/pl/Document/6ba894df3330489656add27ab934f082/dl2250.pdf, supplier 1=TME, supplier part number 1=DL22-100

## Via types
v1: diameter 24, hole 16, Top Layer to Bottom Layer, tented both sides, 284 vias
v2: diameter 61.81, hole 61.81, Top Layer to Bottom Layer, 2 vias
v3: diameter 127.95, hole 127.95, Top Layer to Bottom Layer, 2 vias

## Nets (pads, with @x,y where several pads share a name; then routed paths per layer and width w, separated by ;. In a path a pad name is that pad's centre, name@x,y a point inside that pad or via, vN(x,y) a via of type N, cw(c..) or ccw(c..) an arc to the next point about the centre after c; other vN are vias at no path point)
+12: D1.2 K1.5 K2.5 K3.5 K4.5 K5.5 K6.5 K7.5 K8.5 P11.1 R1.2 R2.2 R3.2 R4.2 R5.2 R6.2 R7.2 R8.2 U2.10 | length 10231.2
  Top Layer w20: K1.5 923.78,3089.22 926,3087 1616.78,3087 ; K2.5 1616.78,3087 ; 2306,3090 2306.78,3090.78 K3.5 ; K4.5 2996.78,3089.22 2998,3088 ; 3686.78,3089 K5.5 ; 4376,3090 4376.78,3090.78 K6.5 ; v1(5055,2302) 5101,2302 v1(5174,2375) ; 5066,3089 5066.78,3089.78 K7.5 ; v1(5098,1407) v1(5098,1598) ; P11.1 5338,1265 5495,1108 5641.65,1108 D1.2 ; v1(5541,2821) 5511,2821 U2.10 5505,3087 ; K8.5 5756.78,3088.22 5757,3088 ; R1.2 6195.15,2172.9 6195.15,2948.85 6057,3087 5505,3087 ; 1616.78,3087 5505,3087
  Bottom Layer w20: v1(5055,2302) 5055,1785 5054,1784 5098,1740 v1(5098,1598) ; v1(5098,1407) 5098,1311.43 P11.1 ; v1(5174,2375) 5541,2742 v1(5541,2821)
/Rst: J1.11 P10.6 | length 1164.5
  Top Layer w10: v1(4058,2407) 4058,2524 4208,2674 4593,2674 P10.6
  Bottom Layer w10: J1.11 3808,2275 3926,2275 v1(4058,2407)
/RxD: J1.6 U1.2 | length 882.9
  Top Layer w10: J1.6 3543,2280 4034,2280 4134.28,2179.72 U1.2
/RxD1: J1.4 U1.27 | length 2090.3
  Top Layer w10: v1(4673,1552) 4673,1593 4705.74,1625.74 U1.27
  Bottom Layer w10: J1.4 3403,2204 3472,2135 4455,2135 4745,1845 4745,1584 4713,1552 v1(4673,1552)
/TxD: J1.5 U1.3 | length 904.5
  Top Layer w10: J1.5 3524.77,2148.23 U1.3
/TxD1: J1.3 U1.28 | length 1871.9
  Top Layer w10: v1(4714,1596) 4737.24,1619.24 U1.28
  Bottom Layer w10: J1.3 3454,2119 4448,2119 4729,1838 4729,1611 v1(4714,1596)
ADC2: J1.12 U1.59 | length 976.4
  Top Layer w10: U1.59 v1(4548.26,2358.74)
  Bottom Layer w10: J1.12 3803,2418 3832,2447 4183.37,2447 4271.63,2358.74 v1(4548.26,2358.74)
CS_ENC: U1.10 U3.9 | length 567.4
  Top Layer w10: U3.9 3940.37,1827 4041.13,1927.76 U1.10
CTS: J1.10 U1.60 | length 1036.1
  Top Layer w10: J1.10 J1.10@3703,2344 ; U1.60 4516.76,2394.76 v1(4517,2395)
  Bottom Layer w10: J1.10@3703,2344 3822,2463 4190,2463 4258,2395 v1@4516.76,2395
DSR: J1.9 U1.30 | length 1603.1
  Top Layer w10: v1(4800,1608) 4800,1675.56 U1.30
  Bottom Layer w10: J1.9 3706,2167 4471,2167 4777,1861 4777,1631 v1(4800,1608)
DTR: J1.7 U1.29 | length 1735.6
  Top Layer w10: U1.29 4768.73,1596.27 v1(4781.5,1583.5)
  Bottom Layer w10: J1.7 3622,2151 4463,2151 4761,1853 4761,1604 v1(4781.5,1583.5)
GND: C1.1 C2.1 C3.1 C4.1 C5.1 C7.1 C8.1 C9.2 C10.1 C11.2 C12.2 C13.2 D2.2 J1.13 P9.2 P10.2 P10.10 P11.2 R17.2 R21.1 R23.1 R27.1 U1.22 U1.53 U1.63 U2.9 U3.2 U3.11 U3.18 U3.21 U3.22 U4.4 | length 10.2
  Top Layer w10: C10.1 C10.1@3253.24,1777
  other v1: 3177,1037 3341.48,1037 3723,1037 3900.93,1037 4490,1037 5048,1037 5271.5,1037 5966,1037 6513,1037 6817,1037 3525,1039 4096,1039 4287,1039 4661.78,1039 4848,1039 5498,1039 5763,1039 6154,1039 6349,1039 6981,1044 3067,1137 5528,1180 5795,1189 6066,1207 2974,1224 6983,1236 6199,1257 5405,1288.86 6005,1300.07 2884,1314 5781,1327.32 5905,1376 6098,1403 6984.5,1403 5292,1407 2777,1419 3538,1425 3690,1428.54 5988,1450 4047,1469 4304,1483 6231,1523 3544,1532.04 3693,1534 6436,1553 6112,1556 5165,1568.65 2781,1578 2196,1588 2371,1588 6978,1588 1861,1590 2013,1591 2582,1591 4939,1624 5275,1630 3881,1631 3549,1634.93 3691,1634.93 6223,1636 6401,1637 6648,1666 4322.06,1680 5379,1707 1740,1708 5577,1713 3690,1737 5889,1737 3553,1740 4835,1751 4664,1752 4586,1755 4506,1757 4419,1759 4151,1760 6979,1763 5398,1791 5583,1794 2143,1797 5125,1798 1647,1800 2404,1802 4664.93,1818 4834,1818 4585,1820 4506,1825 4419,1828 3555,1840 3693,1840 4982,1849 1902,1853 5890.5,1860 5398,1882 5558,1886 5124,1891.88 4834,1894 4586,1895.35 4506,1898 4419,1899 1545,1899.97 6983,1929 3702,1937 5890.5,1964 1760,1965 4508.3,1976 4834,1976 5392,1976 5563.65,1976 4750,1977 5121,1979 4419,1980 6482,1980 1413,2032 3533,2043 4834,2052 4754,2054 4422,2055 5006,2056 4662.71,2057 3715,2064.78 5890.5,2090 5725,2091 5436,2093 5291,2094 5576,2094 1676,2098.2 6301,2099 6986,2117 4664,2129 4752,2130 4599,2132 4834,2132 6483,2146 1412,2186 4840,2199 4517.07,2200 4599,2201 4664.93,2201 4754,2201 5406,2204 6405,2207 6608,2214 6858,2215 2034,2255 6293,2259 1769,2260 2508,2272 2812,2278 2287,2283 5495,2301 1413,2315 6401,2352 6292,2416 3357,2469 2991,2474 1418,2476 6402,2517 4891.34,2541 5011,2541 5427.42,2541 5499,2541 6293,2542 5102,2544 5167.98,2544 5240,2546 3974,2550 3633,2557 5499,2596 1422,2622 5102.56,2627 5167.98,2627 5240,2627 5323,2627 4900,2651.31 5007,2657 6411,2683 5394.86,2690 5240,2691.67 5323,2691.67 5167.98,2692.69 5103.56,2694 6298,2699 5104.28,2752 5166.98,2752 5240,2753 5323,2754 5485,2755 5397.42,2756 3979,2780 4904,2788 1418,2800 6408,2826 5061,2848.65 6311,2910 5936,2930 6109,2930 2430,2942 2646,2942 2858,2942 3040,2942 3225,2942 3578,2942 1613,2944 1983,2944 2200,2944 3421,2944 3753,2944 3924,2944 4981,2944 1774,2945 4842,2947 1418,2949 4111,2949 4309,2948.98 4502.85,2948.98 4691.59,2948.98 6028,3010 6406,3010 5861,3012 6269,3012 1478,3028 1718,3028 1950,3028 2179,3037 2408,3037 2671,3037
INIT: J1.1 P9.1 U1.32 | length 2124.4
  Top Layer w10: v1(4862,1520) 4863.22,1521.22 U1.32
  Bottom Layer w10: J1.1 3397,2076 3644,2076 3870,1850 3998,1850 4166,1682 P9.1 4438,1564 4482,1520 v1(4862,1520)
INT: U1.25 U3.4 | length 977.4
  Top Layer w10: U3.4 3893,1577 3956,1640 v1(4215,1640) ; v1(4642.75,1587) U1.25
  Bottom Layer w10: v1(4215,1640) 4268,1587 v1(4642.75,1587)
LED_A: J2.10 R18.1 R21.2 U3.27 | length 1961.9
  Top Layer w10: R21.2 1971.85,2103 R18.1 1973.85,1992.63 J2.10 ; v1(3371,1494) 3388,1477 U3.27
  Bottom Layer w10: J2.10 1975,1986.77 1975,1839 2183,1631 2880,1631 2983,1528 3337,1528 v1(3371,1494)
LED_B: J2.8 R16.1 R17.1 U3.26 | length 1271.1
  Top Layer w10: J2.8 2550.92,1884.85 R16.1 2660.7,1883.15 R17.1 2746.15,1883 v1(2834,1883) ; v1(3373,1549) 3395,1527 U3.26
  Bottom Layer w10: v1(2834,1883) 2834,1749 3034,1549 v1(3373,1549)
LED_Power: LED9.1 U1.39 | length 366.8
  Top Layer w10: U1.39 4989.24,1927.76 5076,1841 5076,1786 5110,1752 LED9.1
LED_RX: LED10.1 U1.40 | length 309.3
  Top Layer w10: U1.40 4989.75,1959.25 5107,1842 LED10.1
LED_ST: LED12.1 U1.42 | length 262.2
  Top Layer w10: U1.42 5186.7,2022.24 LED12.1
LED_TX: LED11.1 U1.41 | length 284.1
  Top Layer w10: U1.41 5035.25,1990.75 5094,1932 LED11.1
MISO: U1.13 U3.6 | length 590.4
  Top Layer w10: U3.6 3924,1677 4080.27,1833.27 U1.13
MOSI: U1.12 U3.7 | length 582.7
  Top Layer w10: U3.7 3929.46,1727 4067.22,1864.76 U1.12
NetC2_2: C2.2 Q1.1 U1.23 | length 551.6
  Top Layer w10: Q1.1 4579.76,1236.21 4579.76,1344 U1.23
NetC3_2: C3.2 Q1.2 U1.24 | length 552.8
  Top Layer w10: U1.24 4611.25,1239.2 Q1.2
NetC4_2: C4.2 J2.1 L1.1 R14.2 R15.2 | length 961.3
  Top Layer w10: J2.1 2550.32,1803.56 L1.1 2689.56,1803.56 2719,1833 2937,1833 2997,1893 3066,1893 3086,1913 C4.2 ; R15.2 C4.2@3083.27,1950.85
NetC5_2: C5.2 R19.1 R20.1 | length 177.5
  Top Layer w10: C5.2 2246.73,2183.88 R19.1@2253.15,2190.3 ; R20.1 R19.1@2253.15,2190.3 ; R19.1 R19.1@2253.15,2190.3
NetC6_2: C6.2 U3.1 | length 149.4
  Top Layer w10: C6.2 3801.12,1425.95 U3.1
NetC7_2: C7.2 Q2.1 U3.24 | length 564.6
  Top Layer w10: Q2.1 3244.57,1484.54 C7.2 3306.12,1483.12 3331.12,1508.12 3331.12,1591.12 3367,1627 U3.24
NetC8_2: C8.2 Q2.2 U3.23 | length 456.6
  Top Layer w10: Q2.2 2992.66,1678.12 C8.2 3446.72,1678.12 U3.23
NetC11_1: C11.1 U4.3 | length 161.5
  Top Layer w10: C11.1 6567.36,1308.12 U4.3
NetD2_1: D2.1 L2.1 U4.2 | length 784.5
  Top Layer w10: L2.1 6183,1162 6335,1314 6335,1392 6341,1398 D2.1 6423.65,1396 6497,1396 6535,1358 U4.2
NetJ2_7: J2.7 R16.2 | length 113.2
  Top Layer w10: J2.7 2548.67,1991.15 R16.2
NetJ2_9: J2.9 R18.2 | length 113
  Top Layer w10: J2.9 2077.35,2098.2 R18.2
NetK1_1: K1.1 P1.1 | length 1151.7
  Top Layer w30: K1.1 1160,3952 1194.15,3986.15 P1.1
NetK1_2: K1.2 LED1.1 U2.18 | length 5447.9
  Top Layer w10: U2.18 v1(5105,2890) ; v1(5582,2825) 5582,2302 5714.1,2169.9 LED1.1
  Bottom Layer w10: K1.2 1396.22,2986.78 1397,2986 5009,2986 v1(5105,2890) 5517,2890 v1(5582,2825)
NetK1_3: K1.3 P1.2 | length 580.6
  Top Layer w10: P1.2 P1.2@1396.22,4322.78
  Top Layer w30: K1.3 P1.2@1396.22,4322.78
NetK2_1: K2.1 P2.2 | length 1138.5
  Top Layer w30: K2.1 P2.2
NetK2_2: K2.2 LED2.1 U2.17 | length 4692.9
  Top Layer w10: U2.17 v1(5155,2913) ; v1(5613,2846) 5613,2386 5731.15,2267.85 LED2.1 ; LED2.1@5857.94,2264.85 LED2.1@5858.94,2265.85
  Bottom Layer w10: K2.2 2089.22,3002 5066,3002 v1(5155,2913) 5546,2913 v1(5613,2846)
NetK2_3: K2.3 P2.3 | length 595.8
  Top Layer w30: P2.3 2049.85,4063.15 2089.22,4023.78 K2.3
NetK2_4: K2.4 P2.1 | length 595.8
  Top Layer w30: K2.4 1616.78,4036.78 1656.15,4076.15 P2.1
NetK3_1: K3.1 P3.2 | length 1138.5
  Top Layer w30: K3.1 P3.2
NetK3_2: K3.2 LED3.1 U2.16 | length 3937.5
  Top Layer w10: U2.16 v1(5205,2936) ; v1(5640,2867) 5640,2471 5744.15,2366.85 LED3.1 LED3.1@5850.94,2364.85
  Bottom Layer w10: K3.2 2779.22,3018 2802,3018 5123,3018 v1(5205,2936) 5571,2936 v1(5640,2867)
NetK3_3: K3.3 P3.3 | length 595.8
  Top Layer w30: P3.3 2739.85,4067.15 2779.22,4027.78 K3.3
NetK3_4: K3.4 P3.1 | length 595.8
  Top Layer w30: K3.4 2306.78,4010.78 2346.15,4050.15 P3.1
NetK4_1: K4.1 P4.2 | length 1138.5
  Top Layer w30: K4.1 P4.2
NetK4_2: K4.2 LED4.1 U2.15 | length 3201.5
  Top Layer w10: U2.15@5253,2829.07 5255,2827.07 v1(5255,2959) ; v1(5670,2887) 5670,2531 5739.15,2461.85 LED4.1
  Bottom Layer w10: 3469,3034 5180,3034 v1(5255,2959) 5598,2959 v1(5670,2887) ; 3469,3035 3469.22,3035.22 K4.2
NetK4_3: K4.3 P4.3 | length 595.8
  Top Layer w30: P4.3 3429.85,4045.15 3469.22,4005.78 K4.3
NetK4_4: K4.4 P4.1 | length 595.8
  Top Layer w30: K4.4 2996.78,4038.78 3036.15,4078.15 P4.1
NetK5_1: K5.1 P5.2 | length 1138.5
  Top Layer w30: K5.1 P5.2
NetK5_2: K5.2 LED5.1 U2.14 | length 2452.1
  Top Layer w10: U2.14@5305,2827.07 5309,2831.07 v1(5309,2982.39) ; v1(5705,2907) 5705,2618 5767,2556 LED5.1 LED5.1@5854.94,2553
  Bottom Layer w10: K5.2 4159.22,3050 5241.39,3050 v1(5309,2982.39) 5629.61,2982.39 v1(5705,2907)
NetK5_3: K5.3 P5.3 | length 595.8
  Top Layer w30: P5.3 4119.85,4037.15 4159.22,3997.78 K5.3
NetK5_4: K5.4 P5.1 | length 595.8
  Top Layer w30: K5.4 3686.78,4001.78 3726.15,4041.15 P5.1
NetK6_1: K6.1 P6.2 | length 1138.5
  Top Layer w30: K6.1 P6.2
NetK6_2: K6.2 LED6.1 U2.13 | length 1705.2
  Top Layer w10: v1(5355,3006) 5355,2827.07 U2.13@5356,2828.07 ; v1(5737,2927) 5737,2687 5773,2651 LED6.1 LED6.1@5856.94,2650
  Bottom Layer w10: K6.2 4849.22,3066 4864,3066 5295,3066 v1(5355,3006) 5658,3006 v1(5737,2927)
NetK6_3: K6.3 P6.3 | length 595.8
  Top Layer w30: P6.3 4809.85,4088.15 4849.22,4048.78 K6.3
NetK6_4: K6.4 P6.1 | length 595.8
  Top Layer w30: K6.4 4376.78,4087.78 4416.15,4127.15 P6.1
NetK7_1: K7.1 P7.2 | length 1138.5
  Top Layer w30: K7.1 P7.2
NetK7_2: K7.2 LED7.1 U2.12 | length 1160.5
  Top Layer w10: U2.12@5405,2827.07 v1(5405,3029) ; v1(5767.39,2956.39) 5767.39,2790.61 5806,2752 LED7.1
  Bottom Layer w10: K7.2@5542.7,3264.74 5405,3127.04 v1(5405,3029) 5694.78,3029 v1(5767.39,2956.39)
NetK7_3: K7.3 P7.3 | length 595.8
  Top Layer w30: P7.3 5499.85,4011.15 5539.22,3971.78 K7.3
NetK7_4: K7.4 P7.1 | length 595.8
  Top Layer w30: K7.4 5066.78,4002.78 5106.15,4042.15 P7.1
NetK8_1: K8.1 P8.1 | length 1219.1
  Top Layer w30: P8.1 5798.57,3864.43 5993,3670 K8.1
NetK8_2: K8.2 LED8.1 U2.11 | length 1399.5
  Top Layer w10: U2.11@5455,2827.07 v1(5455,3053) ; v1(5801,3053) 5801,2908.94 LED8.1
  Bottom Layer w10: v1(5455,3053) v1(5801,3053) 6160.22,3053 6229.22,3122 K8.2
NetK8_3: K8.3 P8.2 | length 676.3
  Top Layer w30: P8.2 5995.43,3982.33 K8.3
NetLED1_2: LED1.2 R1.1 | length 108
  Top Layer w10: LED1.2@5979.06,2172.85 5982.01,2169.9 R1.1
NetLED2_2: LED2.2 R2.1 | length 116
  Top Layer w10: LED2.2 6084.8,2267.85 R2.1 ; LED2.2@5978.06,2264.85 LED2.2@5981.01,2267.8
NetLED3_2: LED3.2 R3.1 | length 112.8
  Top Layer w10: LED3.2 R3.1
NetLED4_2: LED4.2 R4.1 | length 108.8
  Top Layer w10: LED4.2 R4.1
NetLED5_2: LED5.2 R5.1 | length 109.8
  Top Layer w10: LED5.2 R5.1
NetLED6_2: LED6.2 R6.1 | length 109.8
  Top Layer w10: LED6.2 R6.1
NetLED7_2: LED7.2 R7.1 | length 109.8
  Top Layer w10: LED7.2 R7.1
NetLED8_2: LED8.2 R8.1 | length 109.8
  Top Layer w10: LED8.2 R8.1
NetLED9_2: LED9.2 R9.1 | length 364.4
  Top Layer w10: LED9.2 5664.9,1752 R9.1
NetLED10_2: LED10.2 R10.1 | length 365
  Top Layer w10: LED10.2 5665.9,1842 R10.1
NetLED11_2: LED11.2 R11.1 | length 366
  Top Layer w10: LED11.2 5665.9,1932 R11.1
NetLED12_2: LED12.2 R12.1 | length 364.5
  Top Layer w10: LED12.2 5664.85,2021 R12.1
NetR13_2: R13.2 U1.20 | length 239
  Top Layer w10: R13.2 4409.85,1534.85 4485.27,1610.27 U1.20
NetR22_1: R22.1 R23.2 | length 179.4
  Top Layer w10: R22.1 4126,1970.85 R23.2
NetR22_2: R22.2 U3.14 | length 145.9
  Top Layer w10: U3.14 3947.85,2077 R22.2
NetR24_2: R24.2 U4.1 | length 76.9
  Top Layer w10: U4.1 R24.2@6567.48,1484.85
NetR25_2: R25.2 R26.2 U4.7 U4.8 | length 515.9
  Top Layer w10: R26.2 6753.2,1517.2 6730,1494 6708,1494 6674,1460 6674,1382 6698,1358 U4.7 U4.8 6882.85,1408 R25.2
NetR27_2: R27.2 R28.1 U4.5 | length 292.6
  Top Layer w10: R27.2 R28.1 6790.85,1164.15 6754,1201 6754,1256.52 U4.5
NetU1_44: U1.44 U2.8 | length 759.4
  Top Layer w10: U1.44 5207.4,2085.24 5455,2332.83 U2.8
NetU1_45: U1.45 U2.7 | length 699.6
  Top Layer w10: U1.45 5194.36,2116.73 5405,2327.37 U2.7
NetU1_46: U1.46 U2.6 | length 639.7
  Top Layer w10: U1.46 5181.31,2148.23 5355,2321.92 U2.6
NetU1_47: U1.47 U2.5 | length 579.9
  Top Layer w10: U1.47 5168.27,2179.72 5305,2316.46 U2.5
NetU1_48: U1.48 U2.4 | length 520
  Top Layer w10: U1.48 5155.22,2211.22 5255,2311 U2.4
NetU1_49: U1.49 U2.3 | length 487
  Top Layer w10: U1.49 5134.21,2274.21 5205,2345 U2.3
NetU1_50: U1.50 U2.2 | length 468.3
  Top Layer w10: U1.50 4831.72,2327.72 4861.72,2357.72 5112.72,2357.72 5155.72,2400.72 U2.2@5155.72,2460.2
  Top Layer w20: U2.2 U2.2@5155.72,2460.2
NetU1_51: U1.51 U2.1 | length 433.1
  Top Layer w10: U1.51 4800.23,2361.23 4899.93,2460.93 U2.1
PWR: C12.1 D1.1 R24.1 R25.1 R26.1 U4.6 | length 1892.7
  Top Layer w10: D1.1 5891.65,1277.65 6205.15,1591.15 R24.1 6634.76,1591.15 R26.1@6644.76,1581.15 ; R26.1@6643,1575.09 6643,1343 6678,1308 U4.6 6882.85,1308 R25.1 ; R26.1 6657.91,1590 6702,1590 6702,1637 6730,1665 6730,1779.52 C12.1
RES: U1.14 U3.10 | length 556.8
  Top Layer w10: U3.10 v1(3913,1877) ; v1(4216.77,1801.77) U1.14
  Bottom Layer w10: v1(3913,1877) 4007,1877 4082.23,1801.77 v1(4216.77,1801.77)
RI: J1.2 U1.5 | length 1188.8
  Top Layer w10: v1(4187.24,2085.24) U1.5
  Bottom Layer w10: J1.2 3303,2206 3408,2101 3915,2101 3930.76,2085.24 v1(4187.24,2085.24)
RTS: J1.8 U1.61 | length 1120.3
  Top Layer w10: U1.61 v1(4485.27,2425.73)
  Bottom Layer w10: J1.8 3762,2479 4196.63,2479 4249.63,2426 v1@4484,2426
SCK: U1.11 U3.8 | length 575
  Top Layer w10: U3.8 3934.92,1777 4054.18,1896.26 U1.11
T_PIN+: J2.4 R19.2 U3.12 | length 1959.2
  Top Layer w10: v1(2361.15,2097.15) R19.2 2365.15,2188 2623,2188 2746,2065 v1(2746,1977) ; v1(3644,1953) 3668,1977 U3.12
  Bottom Layer w10: J2.4 2361.15,2030.99 v1(2361.15,2097.15) ; v1(2746,1977) 3210,1977 3234,1953 v1(3644,1953)
T_PIN-: J2.5 R20.2 U3.13 | length 1927.8
  Top Layer w10: J2.5 2143.3,2097.45 R20.2 2182,2101 2199,2084 2199,2059 2210,2048 v1(2576,2048) ; v1(3640,2007) 3655,2022 3797.17,2022 U3.13
  Bottom Layer w10: v1(2576,2048) 2619,2048 2640,2027 3206,2027 3226,2007 v1(3640,2007)
T_POUT+: J2.2 R15.1 U3.17 | length 1341.3
  Top Layer w10: v1(2833,2129) 2863,2099 R15.1 2863,2020 2875,2008 3174,2008 3205,1977 U3.17
  Bottom Layer w10: J2.2 2403,1914.18 2403,2028 2504,2129 v1(2833,2129)
T_POUT-: J2.3 R14.1 U3.16 | length 1381.3
  Top Layer w10: v1(2780,2160) 2920,2160 2973,2107 R14.1 3232.85,2055.15 3261,2027 U3.16
  Bottom Layer w10: J2.3 2301.96,1902.96 2380.35,1981.35 ; 2380.7,1981 2380.7,2036.7 2504,2160 v1(2780,2160)
TCK: P10.1 U1.57 | length 651.1
  Top Layer w10: P10.1 4241,2560 4299,2502 4555,2502 4611.25,2445.75 U1.57
TDI: P10.9 U1.54 | length 731.8
  Top Layer w10: U1.54 v1(4705.74,2457.26)
  Bottom Layer w10: P10.9 4392,2671 4392,2544 4478.74,2457.26 v1(4705.74,2457.26)
TDO: P10.3 U1.55 | length 508.1
  Top Layer w10: U1.55 v1@4674.24,2497
  Bottom Layer w10: P10.3 4565,2498 v1(4675,2498)
TMS: P10.5 U1.56 | length 348.5
  Top Layer w10: U1.56 P10.5@4642.75,2620.25
  Top Layer w20: P10.5 P10.5@4642.75,2620.25
VCC: C1.2 C6.1 C9.1 C10.2 C13.1 J1.14 L1.2 L2.2 P10.4 R9.2 R10.2 R11.2 R12.2 R13.1 R28.2 U1.21 U1.52 U1.64 U3.15 U3.19 U3.20 U3.25 U3.28 | length 12989.6
  Top Layer w10: L1.2 2653,1713 2668.63,1697.37 v1(2680.13,1697.37) ; C10.2 3249,1877 3321,1877 ; v1(3343.58,1796) 3343.58,1824.42 3341,1827 ; v1(3383,1589) 3395,1577 U3.25 ; U3.28 3457.22,1417.62 v1(3457.22,1381) 3457.22,1318.78 3498,1278 C6.1 ; U3.20 3341,1827 ; U3.19 3321,1877 ; C1.2 v1@4368.02,2328.86 ; v1(4362,1408) 4508,1408 4516.15,1416.15 R13.1 4516.15,1675.17 U1.21 ; v1(4370,2328.86) 4390.78,2308.08 U1.64 ; U1.52 v1@4768.73,2368.27 ; R9.2 R10.2 R11.2 R12.2 ; v1(6897.15,1212.15) v1@6898,1213 ; 3321,1877 3321,1847 3341,1827
  Top Layer w20: U3.15 3304.8,2077 3265.8,2116 3161,2116 3056,2221 3056,2329 3137,2410 3945,2410 3987,2368 3987,2320 ; J1.14 3987,2320 ; v1@4368.02,2328.86 v1(4370,2328.86) 4337.14,2296 4074,2296 4050,2320 3987,2320 ; v1(4767,2370) v1@4768.73,2368.27 ; C13.1 5786.34,1521.22 5833,1567.88 ; R9.2 5775.15,1625.73 5833,1567.88 ; C9.1 6124.24,1743.24 L2.2 5937.12,1567.88 5833,1567.88 ; R28.2 v1(6897.15,1212.15)
  Bottom Layer w20: v1(2680.13,1697.37) 2772.76,1790 2772.76,1875 2825.76,1928 2959,1928 3091,1796 v1(3343.58,1796) 3442.22,1697.37 3442.22,1607 ; v1(3383,1589) 3401,1607 3442.22,1607 ; v1(4370,2328.86) 4727,2328.86 4727,2330 v1(4767,2370) 4820,2423 ; P10.4 4617,2546 4697,2546 4820,2423 ; v1(6897.15,1212.15) 6383.85,1212.15 6213,1383 ; 3442.22,1607 3442.22,1396 v1(3457.22,1381) 3493.22,1345 4299,1345 v1(4362,1408) 4413,1459 5335,1459 5540,1254 6084,1254 6213,1383 ; 4820,2423 4912,2331 5410,2331 5663,2078 5663,1735.04 5717.04,1681 6007,1681 v1(6034.98,1653.02) 6070,1618 6070,1526 6213,1383
pads on no net: J1.MH1 J1.MH2 J2.6 K1.4 K8.4 P10.7 P10.8 U1.1 U1.4 U1.6 U1.7 U1.8 U1.9 U1.15 U1.16 U1.17 U1.18 U1.19 U1.26 U1.31 U1.33 U1.34 U1.35 U1.36 U1.37 U1.38 U1.43 U1.58 U1.62 U3.3 U3.5
copper on no net:
  other v1: 3872,2002.88 4238,2041
  other v2: 1944.68,1327.32 2579.32,1327.32
  other v3: 2012,1452.12 2512,1452.12

## Polygon pours and split planes (outlines as drawn)
GND on Bottom Layer "Bottom Layer-GND" (solid, pour order 8): 1333,3056 6455,3056 6453,3054 6453,2283 6949,2283 7020,2212 7020,1015 7019,1014 3139.85,1014 2591.85,1562 1833,1562 1342,2053
GND on Top Layer "Top Layer-GND" (solid, pour order 4): 882,3055 6453,3055 6455,3057 6455,2281 6949.22,2281 7019,2211.22 7019,1015 3140,1015 2740,1415 2740,1561 1835,1561 882,2514